# EAGLE board Assignment 2 (EAGLE 9.7.0)

Size 148.53 x 136.64 mm. Coordinates in mm from the lower left corner, seen from the top.
Outline: 0,0 148.53,0 148.53,136.65 0,136.65 0,0
Copper layers (1*16): Top 0.035mm / dielectric 1.5mm / Bottom 0.035mm
Design rules "default": minimum track width 6mil, minimum drill 0.35mm, track to track 6mil, track to pad 6mil, pad to pad 6mil, via to via 6mil, smd to smd 6mil, copper to edge 40mil, drill to drill 6mil, minimum pad ring 10mil, minimum via ring 8mil, stop-mask expansion 4mil, vias tented up to drill 0mil, thermal gap 10mil

## Footprints (pad centres in the part's own frame; a part is rotated, then mirrored left to right if it is on the bottom)
LEDRD254W60D565H860B = drill 0.981 pad 1.581: 1 -1.27,0; 2 1.27,0
RESAD1016W63L850D250B = drill 0.83 pad 1.43: 1 -5.08,0; 2 5.08,0
SWITCH-MOMENTARY-PTH-6.5MM = drill 1.016 pad 1.88: 1 -3.251,2.261; 2 3.251,2.261; 3 -3.251,-2.261; 4 3.251,-2.261
ARDUINO-UNO-R3-SHIELD = drill 1.016 pad 1.88: 3.3V 24.13,-2.54; 5V 24.13,0; A0 24.13,12.7; A1 24.13,15.24; A2 24.13,17.78; A3 24.13,20.32; A4 24.13,22.86; A5 24.13,25.4; AREF -24.13,-13.97; D2 -24.13,20.32; D3 -24.13,17.78; D4 -24.13,15.24; D5 -24.13,12.7; D6 -24.13,10.16; D7 -24.13,7.62; D8 -24.13,3.81; D9 -24.13,1.27; D10 -24.13,-1.27; D11 -24.13,-3.81; D12 -24.13,-6.35; D13 -24.13,-8.89; GND@0 24.13,2.54; GND@1 24.13,5.08; GND@2 -24.13,-11.43; IOREF 24.13,-7.62; NC 24.13,-10.16; RES 24.13,-5.08; RX -24.13,25.4; SCL -24.13,-19.05; SDA -24.13,-16.51; TX -24.13,22.86; VIN 24.13,7.62

## Placement (x,y rotation side)
DML  RED  [LEDRD254W60D565H860B]  121.23,104.23 180 top
DSL  RED  [LEDRD254W60D565H860B]  114.57,16.79 180 top
R1  2.2k  [RESAD1016W63L850D250B]  119.96,116.93 90 top
R1A  1k  [RESAD1016W63L850D250B]  132.66,114.39 0 top
R1B  1k  [RESAD1016W63L850D250B]  131.08,21.87 0 top
R2  2.2k  [RESAD1016W63L850D250B]  115.84,26.95 90 top
S1  SWITCH_MOMENTARY  [SWITCH-MOMENTARY-PTH-6.5MM]  140.28,100.42 90 top
S2  SWITCH_MOMENTARY  [SWITCH-MOMENTARY-PTH-6.5MM]  138.7,28.22 90 top
UMASTER  ARDUINO-UNO-R3-SHIELD  [ARDUINO-UNO-R3-SHIELD]  47.88,106.8 270 top
USLAVE  ARDUINO-UNO-R3-SHIELD  [ARDUINO-UNO-R3-SHIELD]  48.62,29.84 270 top

## Library data of the parts
DML DSL = Tinkercad; CATEGORY: Opto-Electronic; SUB-CATEGORY: LED; VALUE: LED_RED
R1 R1A R1B R2 S1 S2 UMASTER USLAVE = Tinkercad

## Nets
DML_C: DML.2 R1.1
DSL_A: DSL.1 R2.1
UMASTER_D2: DML.1 UMASTER.D2
UMASTER_D3: S1.1 S1.2 UMASTER.D3
UMASTER_D10: UMASTER.D10 USLAVE.D10
UMASTER_D11: UMASTER.D11 USLAVE.D11
UMASTER_D12: UMASTER.D12 USLAVE.D12
UMASTER_D13: UMASTER.D13 USLAVE.D13
UMASTER_GND: R1.2 R1A.1 S1.3 S1.4 UMASTER.GND@0 UMASTER.GND@1 UMASTER.GND@2
USLAVE_3.3V: S2.3 S2.4 USLAVE.3.3V
USLAVE_D2: R2.2 USLAVE.D2
USLAVE_D3: R1B.2 S2.1 S2.2 USLAVE.D3
USLAVE_GND: DSL.2 R1B.1 USLAVE.GND@0 USLAVE.GND@1 USLAVE.GND@2

## Tracks (layer width: path | path; a pad name or v marks a point on that pad's centre or on a via)
DML_C  (1 unrouted)
DSL_A  (1 unrouted)
UMASTER_D2  (1 unrouted)
UMASTER_D3  (2 unrouted)
UMASTER_D10  (1 unrouted)
UMASTER_D11  (1 unrouted)
UMASTER_D12  (1 unrouted)
UMASTER_D13  (1 unrouted)
UMASTER_GND  (6 unrouted)
USLAVE_3.3V  (2 unrouted)
USLAVE_D2  (1 unrouted)
USLAVE_D3  (3 unrouted)
USLAVE_GND  (4 unrouted)